# Altium PCB PCB1.PcbDoc
Units mm, origin at the board's own origin, x right, y up, seen from the top; angles counter-clockwise.
Board outline 40.13 x 45.13 mm, 2 copper layers (Top Layer, Bottom Layer); 36 components, 28 nets, 121 pads, 9 vias.
Unrouted connection lines stored in the file: 1.
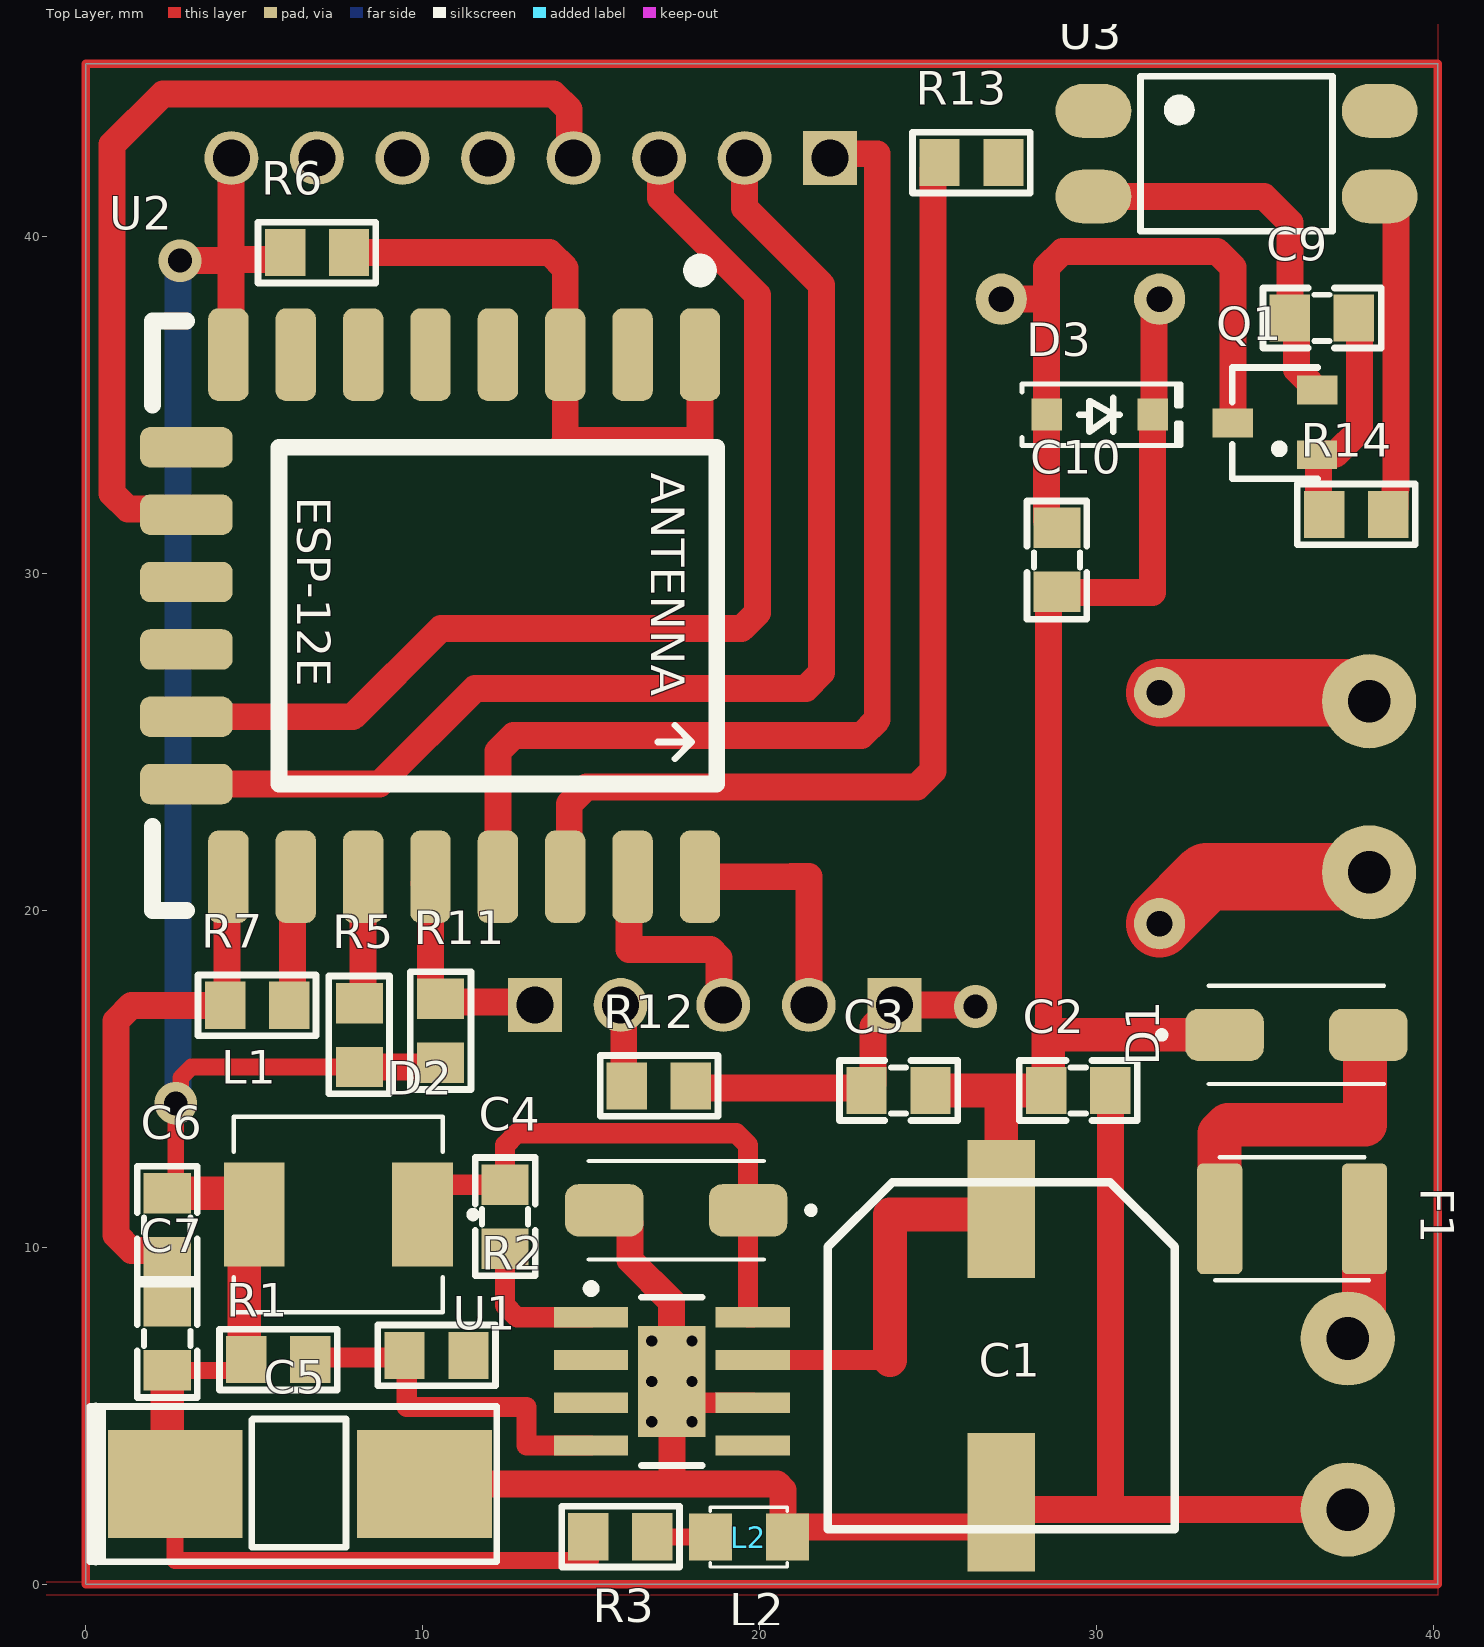
[diagram p0: Top Layer view]
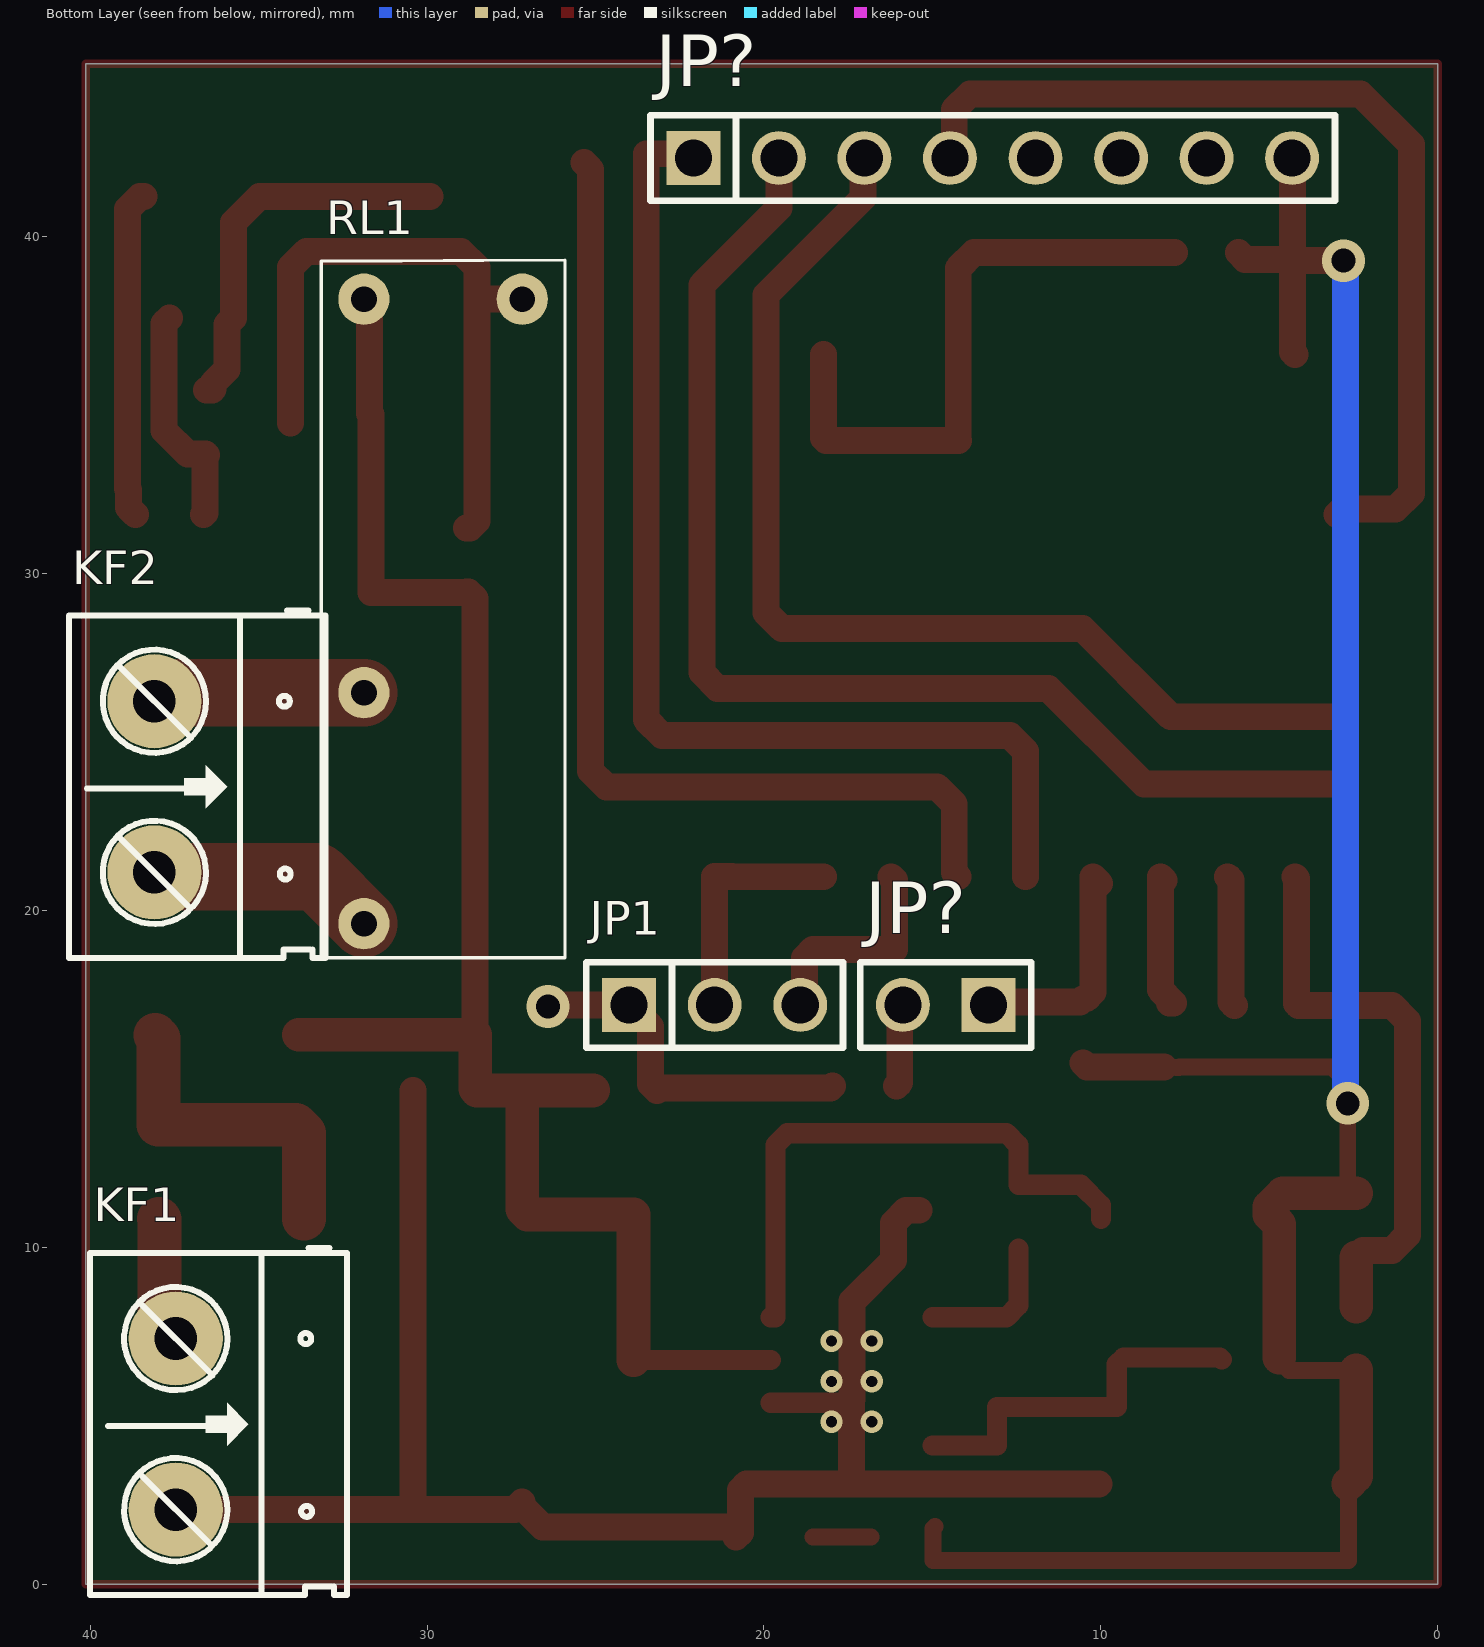
[diagram p1: Bottom Layer view, seen from below]
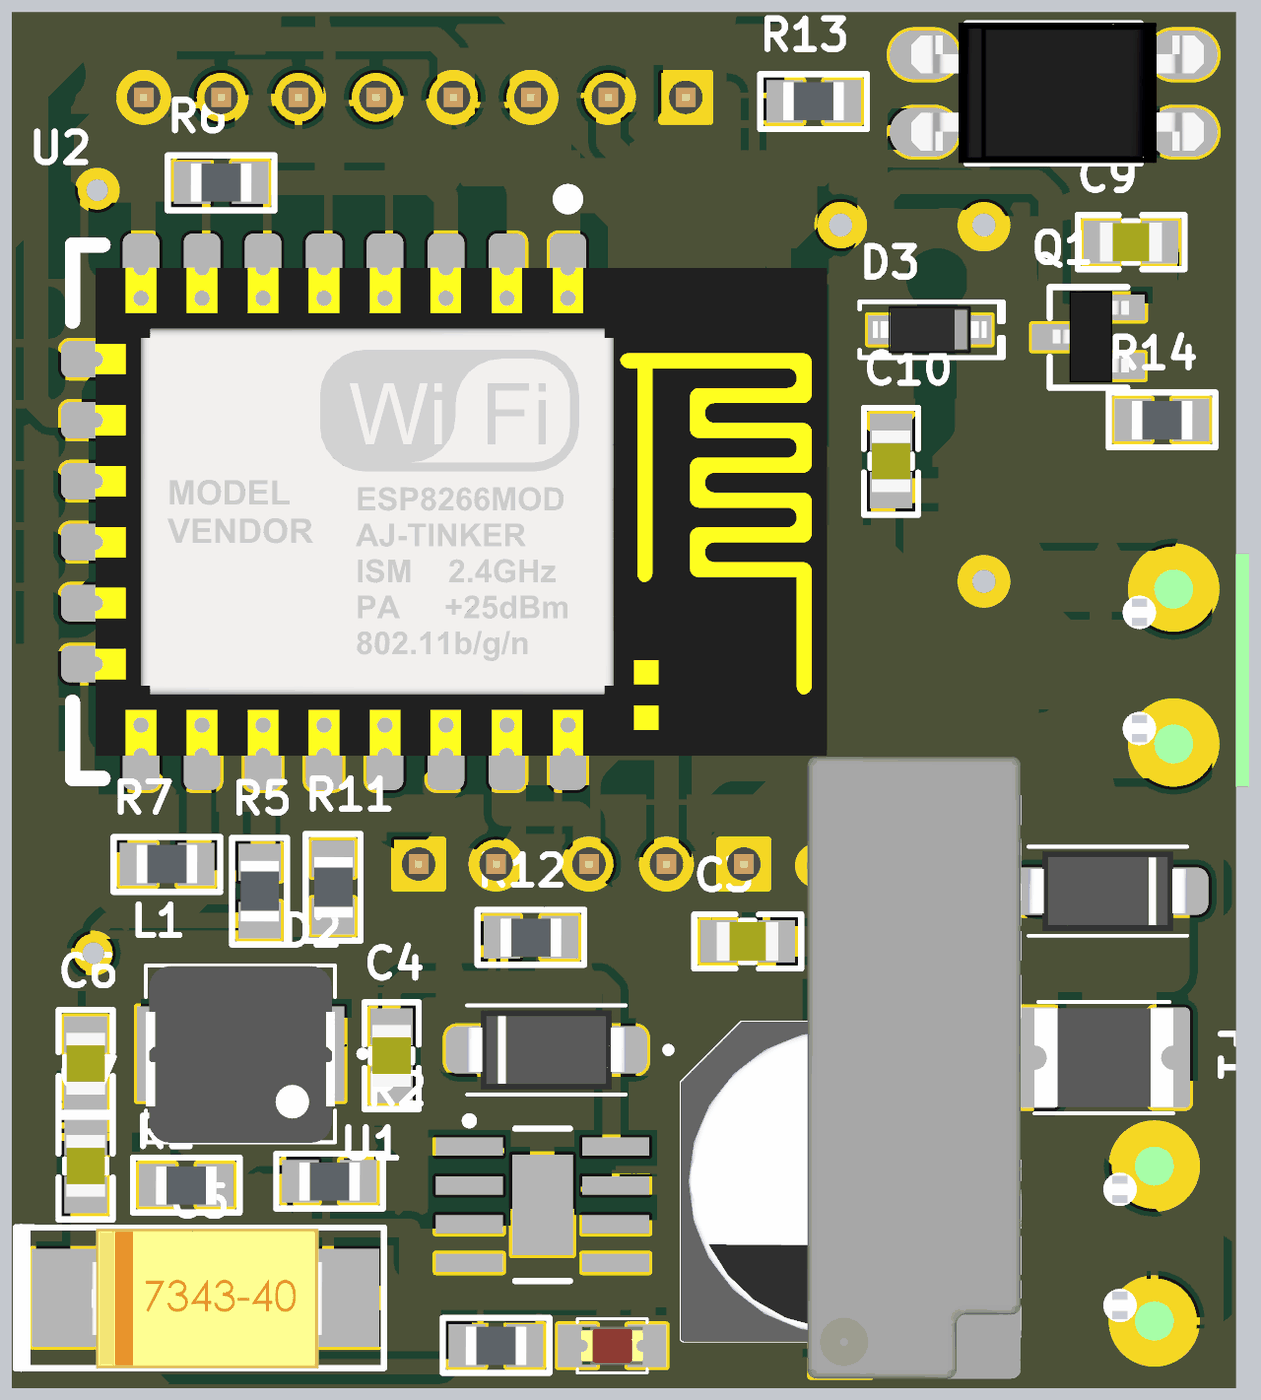
[diagram p2: 3D render of the assembled board from above, using the file's embedded part models]
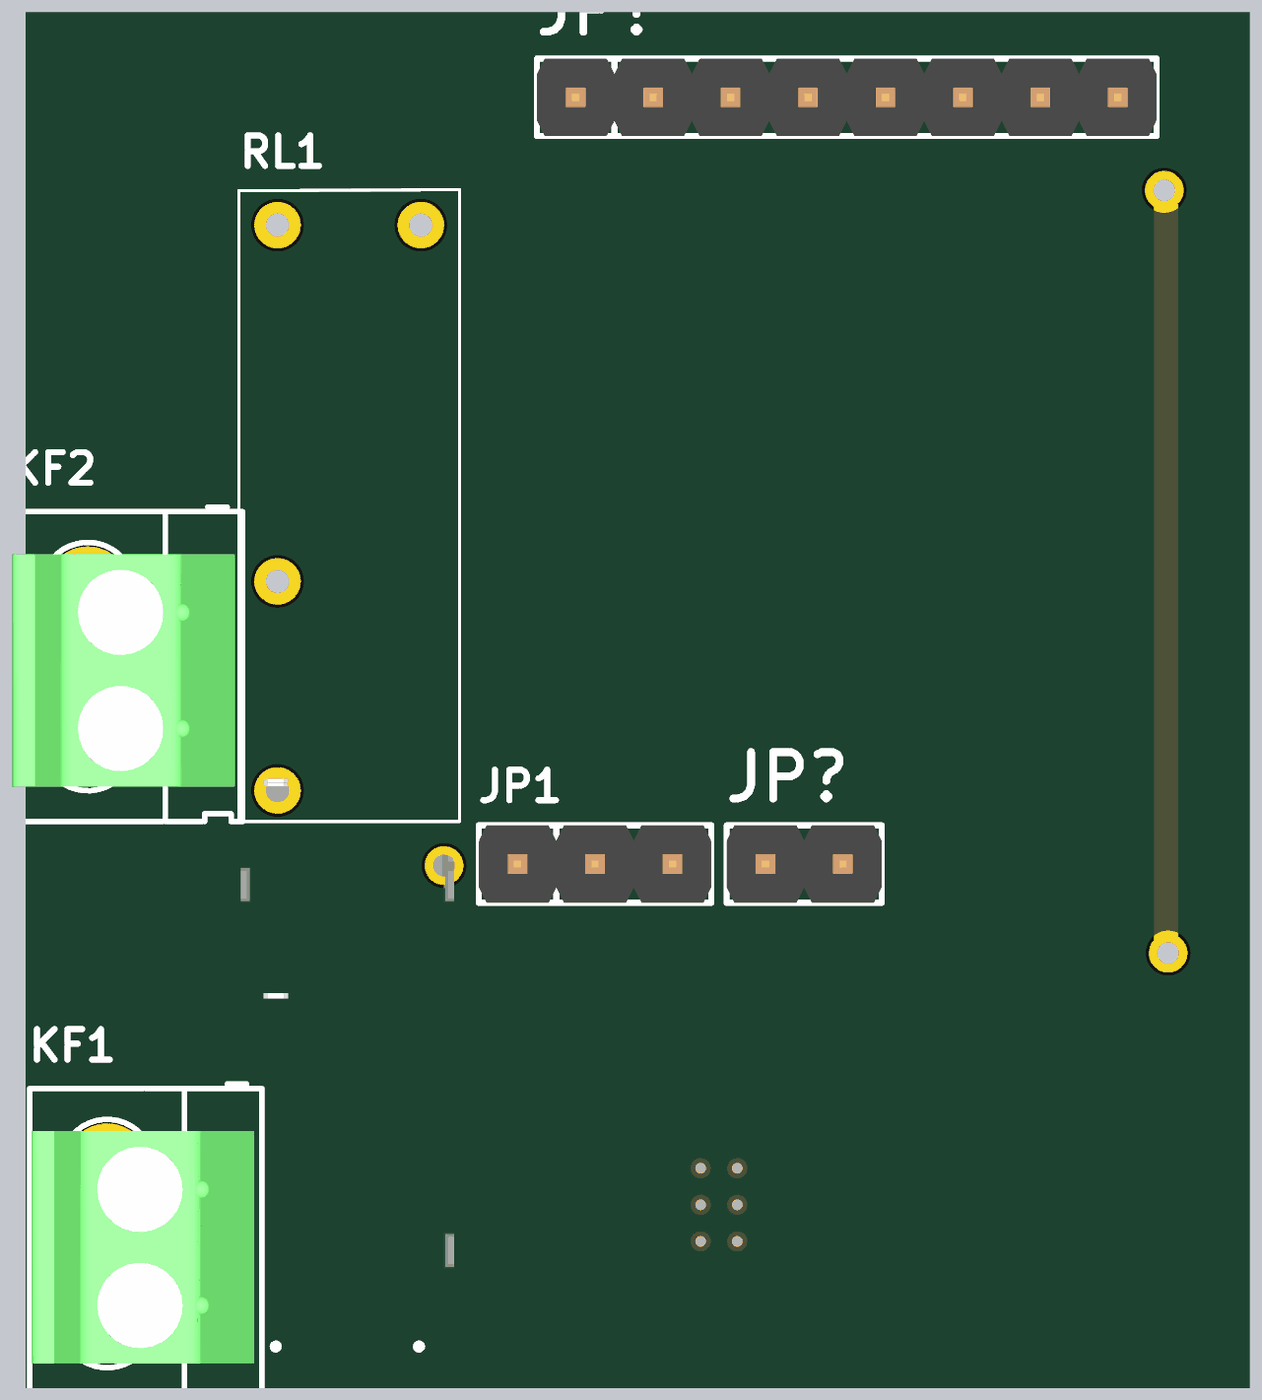
[diagram p3: 3D render of the assembled board from below, using the file's embedded part models]

## Layer stack, top to bottom
Top Solder: solder mask 0.0102, Solder Resist, Dk 3.5
Top Layer: signal copper 0.0356
Dielectric 1: dielectric 0.32, FR-4, Dk 4.8
Bottom Layer: signal copper 0.0356
Bottom Solder: solder mask 0.0102, Solder Resist, Dk 3.5

## Board outline
0,0 0,45.135 40.132,45.135 40.132,0

## Design rules (kind name [scope] priority, off if disabled: settings)
Clearance [All] p1: gap=0.254 ignorepadtopadclearanceinfootprint=FALSE except(0: Arc-Hole Track-Hole SMDPad-Hole THPad-Hole Via-Hole Fill-Hole Poly-Hole Region-Hole Text-Hole)
PolygonConnect [All] p1: connectstyle=Relief reliefconductorwidth=0.254 reliefentries=4 polygonreliefangle="90 Angle" airgapwidth=0.254
RoutingVias [All] p1: holewidth=0.711 width=1.27 viastyle="Through Hole" minholewidth=0.711 minwidth=1.27 maxholewidth=0.711 maxwidth=1.27
SolderMaskExpansion [All] p1: expansion=0.102 istentingtop=FALSE
Width [All] p1: maxlimit=2.5 minlimit=0.254 preferedwidth=0.8 minimp=50.000000 maximp=50.000000 favimp=50.000000
30 further rules are at their usual default settings.

## Classes and differential pairs
component class Sheet1: C1 C2 C3 C4 C5 C6 C7 C9 C10 D1 D2 D3 F1 JP1 JP? KF1 KF2 L1 L2 Q1 R1 R2 R3 R5 R6 R7 R11 R12 R13 R14 RL1 U1 U2 U3

## Components (designator, comment, footprint, x,y, rotation, side; value= is the part's Value field where it differs from the comment)
C1 "1000uF" "tu nhom 10 (G)" 27.178,6.781 r270 top
C2 "2.2nF" "tu 0805" 29.464,14.655 r0 top
C3 "2.2nF" "tu 0805" 24.13,14.655 r180 top
C4 "0.01uF" "tu 0805" 12.449,10.91 r270 top
C5 "470uF" "tu tantalum smd7343" 6.35,2.971 r0 top
C6 "10nF" "tu 0805" 2.416,10.656 r270 top
C7 "100nF" "tu 0805" 2.413,7.289 r90 top
C9 "10nF" "tu 0805" 36.703,37.592 r180 top
C10 "10nF" "tu 0805" 28.829,30.403 r90 top
D1 "B340A-13" B340A 35.941,16.306 r0 top
D2 "B340A-13" B340A 17.526,11.099 r180 top
D3 "S4" "DIODE SOD-123" 30.099,34.721 r0 top
F1 "2A 24V" "Cau chi tu phuc hoi 2A 24V SMD1812" 35.814,10.845 r180 top
JP1 "JP 1x3 2.54" "JP 1x3 DT" 24.003,17.195 r180 bottom
JP? "JP 1x2 2.54" "JP 1x2 DT" 13.335,17.195 r0 bottom
JP? "JP 1x8 2.54" "JP 1x8 DT" 22.098,42.341 r180 bottom
KF1 "CON 2 KF301" "Con 2 KF301 5.08" 37.465,7.289 r270 bottom
KF2 "CON 2 KF301" "Con 2 KF301 5.08" 38.1,26.212 r270 bottom
L1 "15uH" "CUON CAM SMD 0530" 7.493,10.972 r180 top
L2 "LED 0805" LED-0805-Red 18.542,1.397 r0 top
Q1 "BC817" SOT-23 35.306,34.467 r90 top value=C9014
R1 "10k" "RES 0805" 5.715,6.654 r180 top
R2 "5.9k" "RES 0805" 10.414,6.781 r180 top
R3 "1k" "RES 0805" 15.875,1.397 r180 top
R5 "10k" "RES 0805" 8.128,16.306 r270 top
R6 "10k" "RES 0805" 6.858,39.547 r0 top
R7 "10K" "RES 0805" 5.08,17.195 r0 top
R11 "10k" "RES 0805" 10.541,16.433 r270 top
R12 "470" "RES 0805" 17.018,14.782 r180 top
R13 "470" "RES 0805" 26.289,42.214 r0 top
R14 "1k" "RES 0805" 37.719,31.75 r180 top
RL1 "RelayHF46" "Relay 4 chan HF46F" 31.877,38.15 r90 bottom
U1 "tps5430-DIS" SOIC127P600X170_HS-8N 17.399,6.019 r0 top (schematic designator u1)
U2 "ESP-12E" ESP-12E 14.732,28.752 r270 top
U3 "OPTO PC817 SMD" SOP4 34.163,42.468 r0 top value=PC817
? "mfrc522" MFRC522 67.229,58.023 r270 top

## Footprints (in the part's own frame and the unit in brackets; to place one, negate y for a bottom-side part, rotate by r counter-clockwise, add the part's x,y. Pads: shape width x height; smd on the part's side, far side on the other; paste and mask are expansions set on the pad)
B340A [mm]
  rrect50% 2.33x1.55 smd: A(2.135,0) C(-2.135,0)
  silkscreen extent -4.1,-1.46 2.6,1.46, body extent -2.6,-1.3 2.6,1.3, height 2.4
"Cau chi tu phuc hoi 2A 24V SMD1812" [mm]
  rrect25% 1.34x3.29 smd: 1(-2.15,0) 2(2.15,0)
  silkscreen extent -2.28,-1.82 2.28,1.82, body extent -2.27,-1.62 2.27,1.62, height 1.25
"Con 2 KF301 5.08" [mil]
  round 110 hole 50: 1(0,0) 2(200,0)
  silkscreen extent -106,-100 300,200, body extent -45,-97 255,190, height 335
"CUON CAM SMD 0530" [mm] "CUON CAM SMD 0530"
  rect 1.8x3.1 smd: 1(-2.5,0) 2(2.5,0)
  silkscreen extent -4.1,-2.9 3.1,2.9, body extent -3.1,-2.88 3.1,2.92, height 3
"DIODE SOD-123" [mm] "SOD-123"
  rect 0.9x0.95 smd: 1(-1.575,0) 2(1.575,0)
  silkscreen extent -2.3,-0.92 2.41,0.92, body extent -1.86,-0.78 1.86,0.77, height 1.35
ESP-12E [mm]
  rrect50% 2.75x1.2 smd: 1(-7.75,3.5) 2(-7.75,1.5) 3(-7.75,-0.5) 4(-7.75,-2.5) 5(-7.75,-4.5) 6(-7.75,-6.5) 7(-7.75,-8.5) 8(-7.75,-10.5) 15(7.75,-10.5) 16(7.75,-8.5) 17(7.75,-6.5) 18(7.75,-4.5) 19(7.75,-2.5) 20(7.75,-0.5) 21(7.75,1.5) 22(7.75,3.5)
  rrect50% 1.2x2.75 smd: 9(-5,-11.75) 10(-3,-11.75) 11(-1,-11.75) 12(1,-11.75) 13(3,-11.75) 14(5,-11.75)
  silkscreen extent -10.5,-12.75 8.75,4, body extent -8.01,-12.01 8.01,12, height 2.66
"JP 1x2 DT" [mm] "2 pins, 1 row, straight, gold plating"
  rect 1.6x1.6 hole 1.1: 1(0,0)
  round 1.6 hole 1.1: 2(2.54,0)
  silkscreen extent -1.27,-1.27 3.81,1.27, body extent -1.27,-1.27 3.81,1.27, height 8.54
"JP 1x3 DT" [mm]
  rect 1.6x1.6 hole 1.1: 1(0,0)
  round 1.6 hole 1.1: 2(2.54,0) 3(5.08,0)
  silkscreen extent -1.27,-1.27 6.35,1.27, body extent -1.27,-1.27 6.35,1.27, height 8.54
"JP 1x8 DT" [mm] "8 pins, 1 row, straight, gold plating"
  rect 1.6x1.6 hole 1.1: 1(0,0)
  round 1.6 hole 1.1: 2(2.54,0) 3(5.08,0) 4(7.62,0) 5(10.16,0) 6(12.7,0) 7(15.24,0) 8(17.78,0)
  silkscreen extent -1.27,-1.27 19.05,1.27, body extent -1.27,-1.27 19.05,1.27, height 8.54
LED-0805-Red [mil]
  rect 50x55 smd: 1(0,0) 2(90,0)
  silkscreen extent 0,-35 90,35, body extent 5,-25 85,25, height 43
MFRC522 [mm]
  round 5.5 hole 3.5: 1(14.8,17) 1(14.8,-17) 1(51.8,-12.6) 1(51.8,12.4)
  rect 1.524x1.524 hole 0.762: 3(1.8,8.8)
  round 1.524 hole 0.762: 4(1.8,6.4) 5(1.8,4) 6(1.8,1.4) 7(1.8,-1.2) 8(1.8,-3.6) 9(1.8,-6) 10(1.8,-8.6)
  silkscreen extent 0,-20.13 60,19.69, body extent 0.4,-19.7 59.9,19.3, height 5
"Relay 4 chan HF46F" [mil]
  round 60 hole 30: 1(0,0) 2(0,-185.04) 3(-460,0) 4(-730,0)
  silkscreen extent -770,-235 46,50, body extent -763,-228 40,48, height 154
"RES 0805" [mm]
  rect 1.2x1.4 smd: 1(-0.946,-0.01) 2(0.954,-0.01)
  silkscreen extent -1.75,-0.91 1.75,0.89, body extent -1,-0.62 1,0.63, height 0.5
SOIC127P600X170_HS-8N [mm] "SOIC, 8-Leads, Body 5.0x4.0mm (max), Pitch 1.27mm, IPC Medium Density"
  rect 2.2x0.6 smd: 1(-2.4,1.905) 2(-2.4,0.635) 3(-2.4,-0.635) 4(-2.4,-1.905) 5(2.4,-1.905) 6(2.4,-0.635) 7(2.4,0.635) 8(2.4,1.905)
  rect 2x3.3 smd: 9(0,0)
  silkscreen extent -2.52,-2.5 0.9,2.88, body extent -2,-2.5 2,2.5, height 1.7
SOP4 [mm]
  oval 2.25x1.6 smd: 1(-4.25,1.27) 2(-4.25,-1.27) 3(4.25,-1.27) 4(4.25,1.27)
  silkscreen extent -2.85,-2.3 2.85,2.3, body extent -4.67,-2.29 4.93,2.31, height 3.6
SOT-23 [mm] "SOT 23 _ 1-3-2"
  rect 0.85x1.2 smd: 1(-0.94,-1.245) 2(0.985,-1.25) 3(0.005,1.25)
  silkscreen extent -1.65,-1.27 1.65,1.27, body extent -1.47,-1.33 1.53,1.17, height 1.06
"tu 0805" [mm] "Compoment SMD 80x50mil"
  rect 1.2x1.4 smd: 1(-0.946,-0.003) 2(0.954,-0.003)
  silkscreen extent -1.75,-0.89 1.75,0.89, body extent -1.01,-0.64 1.01,0.63, height 0.61
"tu nhom 10 (G)" [mm]
  rect 4.1x2 smd: 1(-4.35,0) 2(4.35,0)
  silkscreen extent -5.15,-5.15 5.15,5.15, body extent -5.9,-5.25 5.9,5.25, height 10.5
"tu tantalum smd7343" [mm]
  rect 4x3.2 smd: 1(-3.7,0) 2(3.7,0)
  silkscreen extent -6.23,-2.31 5.85,2.31, body extent -3.75,-2.33 3.85,2.27, height 3.99

## Part data
C1: library part "Tu Nhom 1000uF 16V", "Dán", Chung_Loai=Dán, Don_Vi=Con, Ma_Hang=MH004419, So_Chan=2, Ten_Linh_Kien="Tụ Nhôm 1000uF 16V 10x10MM"
C2 C3 C6 C7 C9 C10: library part "Tu 0805 22nF 50V 20%", "Dán", Chung_Loai=Dán, Don_Vi=Con, Ma_Hang=MH007857, So_Chan=2, Ten_Linh_Kien="Tụ 0805 22nF 50V 20%"
C4: library part "Tu 0805 15pF 50V 10%", "Dán", Chung_Loai=Dán, Don_Vi=Con, Ma_Hang=MH004556, So_Chan=2, Ten_Linh_Kien="Tụ 0805 15P 10% 50V"
C5: library part "Tu tantalum 470uF 10V SMD7343", "Dán", Chung_Loai=Dán, Don_Vi=Con, Ma_Hang=MH001956, So_Chan=2, Ten_Linh_Kien="Tụ tantalum 477A-470uF 10V SMD7343"
D1 D2: "Diode Schottky 40 V 3A Surface Mount SMA", Package="DO-214 Diodes Inc.", Availability="In Stock", Check_prices=https://www.snapeda.com/parts/B340A-13/Diodes+Inc./view-part/?ref=eda, MF="Diodes Inc.", MP=B340A-13, Price=None, Purchase-URL=https://pricing.snapeda.com/search/part/B340A-13/?ref=eda, SnapEDA_Link=https://www.snapeda.com/parts/B340A-13/Diodes+Inc./view-part/?ref=snap
D3: library part "Diode S4", "Dán", Chung_Loai=Dán, Don_Vi=Con, Ma_Hang=MH005519, Ten_Linh_Kien="Diode S4 SOD123 ( 1N5819 SOD123)"
F1: library part "Cau chi tu phuc hoi 2A 24V SMD1812", "2A 24V SMD1812", Ma_Hang=MH010033, Ten="Cầu Chì Tự Phục Hồi 2A 24V SMD1812"
JP1: library part "JP 1x3 2.54 Duc Thang", "Cắm", Chung_Loai=Cắm, Don_Vi=Con, Ma_Hang=MH000903, Ten_Linh_Kien="Jump Đơn Đực 2.54MM 1x40P Thẳng 11MM"
JP?: library part "JP 1x2 2.54 Duc Thang", "Cắm", Chung_Loai=Cắm, Don_Vi=Con, Ma_Hang=MH000903, Ten_Linh_Kien="Jump Đơn Đực 2.54MM 1x40P Thẳng 11MM"
JP?: library part "JP 1x8 2.54 Duc Thang", "Cắm", Chung_Loai=Cắm, Don_Vi=Con, Ma_Hang=MH000903, Ten_Linh_Kien="Jump Đơn Đực 2.54MM 1x40P Thẳng 11MM"
KF1 KF2: "Cắm", Chung_Loai=Cắm, Don_Vi=Con, Ma_Hang=MH000987, Ten_Linh_Kien="CON 2 KF301-2P 5.08MM Xanh Dương"
L1: library part "Cuon Cam SMD 0530", "SMD 0530", Package=None, Availability=Unavailable, MP=FDV0530-H-1R5M=P3, Price=None
L2: library part "LED 0805 Do", "Dán", Chung_Loai=Dán, Don_Vi=Con, Ma_Hang=MH000897, Ten_Linh_Kien="LED 0805 Màu Đỏ (Red)"
Q1: library part "Trans BC817", "SOT-23 - C8658"
R1 R5 R6 R11: library part "RES 0805", "RES SMD 0805", Manufacturer="Vishay Dale", Manufacturer Part Number=CRCW040210K0FKED, Operating Temperature="-55°C ~ 155°C", Package / Case="0402 (1005 Metric)", Power (Watts)="0.063W, 1/16W", Supplier Part Number 1=541-10.0KLCT-ND, Temperature Coefficient=±100ppm/°C, Tolerance=±1%, Category=Resistors, ComponentLink1Description=http://www.vishay.com/docs/20035/dcrcwe3.pdf, ComponentLink1URL=http://www.vishay.com/docs/20035/dcrcwe3.pdf, Composition="Thick Film", Features="Automotive AEC-Q200", Height="0.016\" (0.40mm)", Number of Terminations=2, Packaging="Cut Tape (CT)", Pricing 1="10=0.083, 50=0.0444, 200=0.0255, 1000=0.0174 (USD)", Resistance (Ohms)=10k, RoHS="RoHS Compliant", Size / Dimension="0.039\" L x 0.020\" W (1.00mm x 0.50mm)", Stock 1=2392462, Supplier 1=Digi-Key, Supplier Device Package="0402 (1005 Metric)"
R2 R3 R7 R12 R13 R14: library part "RES 0805", "RES SMD 0805", Manufacturer="Vishay Dale", Manufacturer Part Number=CRCW040210K0FKED, Operating Temperature="-55°C ~ 155°C", Package / Case="0402 (1005 Metric)", Power (Watts)="0.063W, 1/16W", Resistance (Ohms)=10k, Supplier Part Number 1=541-10.0KLCT-ND, Temperature Coefficient=±100ppm/°C, Tolerance=±1%, Category=Resistors, ComponentLink1Description=http://www.vishay.com/docs/20035/dcrcwe3.pdf, ComponentLink1URL=http://www.vishay.com/docs/20035/dcrcwe3.pdf, Composition="Thick Film", Features="Automotive AEC-Q200", Height="0.016\" (0.40mm)", Number of Terminations=2, Packaging="Cut Tape (CT)", Pricing 1="10=0.083, 50=0.0444, 200=0.0255, 1000=0.0174 (USD)", RoHS="RoHS Compliant", Size / Dimension="0.039\" L x 0.020\" W (1.00mm x 0.50mm)", Stock 1=2392462, Supplier 1=Digi-Key, Supplier Device Package="0402 (1005 Metric)"
RL1: library part "Relay 4 chan HF46F", "Relay 4 chan HF46F", Ma_Hang=MH003879, Ten="Relay 5V5A HF46F-G 5-HS1"
U2: "ESP8266 ESP-12E Module (ESP8266, Castellated Holes)", Manufacturer=AI-THINKER, Manufacturer Part Number=ESP-12E
U3: "Single Opto"

## Via types
v1: diameter 0.66, hole 0.33, Top Layer to Bottom Layer, tented top, 6 vias
v2: diameter 1.27, hole 0.711, Top Layer to Bottom Layer, 3 vias

## Nets (pads, with @x,y where several pads share a name; then routed paths per layer and width w, separated by ;. In a path a pad name is that pad's centre, name@x,y a point inside that pad or via, vN(x,y) a via of type N, cw(c..) or ccw(c..) an arc to the next point about the centre after c; other vN are vias at no path point)
+3.3V: C5.1 C6.1 C7.1 JP?.8 L1.2 R1.2 R3.2 R5.2 R6.1 R11.2 U2.8 | length 74.2
  Top Layer w0.5: C6.1 2.667,11.856 v2(2.667,14.274) 2.814,14.421 2.814,15.032 3.134,15.352 7.668,15.352 7.678,15.342 R5.2@7.747,15.342 ; C7.1 4.411,6.343 4.699,6.632 R1.2@4.699,6.726 ; C5.1 2.65,0.702 14.986,0.702 14.986,1.646 R3.2@14.921,1.711
  Top Layer w0.8: v2(2.794,39.293) 4.271,39.293 4.31,39.332 ; U2.8 4.31,36.58 4.31,39.332 ; JP?.8 4.31,42.333 4.31,39.332 ; R6.1 5.912,39.532 5.712,39.332 4.31,39.332 ; R5.2 10.404,15.352 R11.2
  Top Layer w1: C6.1 4.593,11.602 4.993,11.202 L1.2 4.699,10.678 R1.2@4.699,6.726 ; C7.1 2.416,3.205 C5.1
  Bottom Layer w0.8: v2(2.667,14.274) 2.73,14.337 2.73,39.229 v2(2.794,39.293)
+12V: C1.1 C2.1 C3.1 C10.1 D1.C D3.2 RL1.1 U1.7 | length 50.5
  Top Layer w0.6: U1.7 23.876,6.654
  Top Layer w0.8: 28.575,16.306 28.575,29.257 28.775,29.457 C10.1 28.852,29.438 31.674,29.438 D3.2 31.712,34.759 31.712,38.112 RL1.1@31.75,38.15
  Top Layer w1: 23.876,6.654 23.876,10.972 27.019,10.972 C1.1 27.178,14.655 ; C3.1 25.079,14.655 27.178,14.655 ; D1.C 28.575,16.306 28.575,14.708 C2.1 28.515,14.655 27.178,14.655
FLASH: JP?.1@13.335,17.195 R11.1 U2.18 | length 7
  Top Layer w0.8: U2.18@10.033,20.803 U2.18 10.232,17.579 10.432,17.379 R11.1 10.623,17.287 13.243,17.287 JP?.1@13.335,17.195
GND: C1.2 C2.2 C3.2 C5.2 C6.2 C7.2 C9.2 D2.A JP1.1 JP?.6 KF1.2 L2.2 Q1.2 R2.1 R7.1 R12.1 U1.6 U1.9 U2.15 U3.2 | length 92.4
  Top Layer w0.6: U1.9@17.476,5.384 U1.6
  Top Layer w0.8: C6.2 2.213,9.902 1.358,9.902 0.889,10.371 0.889,16.716 1.358,17.185 R7.1 4.183,17.234 4.183,20.953 U2.15 ; C5.2 17.399,2.971 ; D2.A 15.781,11.099 16.156,10.724 16.156,9.625 17.381,8.4 17.381,5.479 U1.9@17.476,5.384 ; U1.9@17.399,5.461 17.399,2.971 ; R12.1 18.03,14.725 23.109,14.725 C3.2 23.368,14.851 23.368,16.56 JP1.1 26.366,17.195 v2(26.416,17.145) ; L2.2 20.701,1.524 20.701,2.794 20.524,2.971 17.399,2.971 ; L2.2@20.828,1.701 26.578,1.701 27.178,2.301 C1.2 27.4,2.209 30.353,2.209 ; U3.2 34.976,41.198 35.749,40.425 C9.2 35.949,37.395 35.949,36.06 36.356,35.652 36.356,35.477 36.381,35.452 Q1.2 ; C2.2 30.418,2.274 30.353,2.209 ; KF1.2 30.353,2.209
  Top Layer w1: C6.2 2.415,9.7 2.415,9.271 C7.2 C7.2
  other v1: 16.799,4.819 17.999,4.819 16.799,6.019 17.999,6.019 16.799,7.219 17.999,7.219
MISO: JP?.4 U2.10 | length 28.7
  Top Layer w0.8: U2.10 2.818,31.916 1.25,31.916 0.781,32.385 0.781,42.741 2.286,44.246 13.882,44.246 14.351,43.777 14.351,42.468 JP?.4
MOSI: JP?.3 U2.13 | length 32.9
  Top Layer w0.8: U2.13 7.922,25.752 10.541,28.371 19.47,28.371 19.939,28.84 19.939,38.277 17.061,41.155 17.061,42.298 JP?.3
NetC4_1: C4.1 D2.C L1.1 U1.8 | length 17
  Top Layer w0.6: L1.1@9.993,10.845 9.993,11.256 10.593,11.856 C4.1 12.446,13.034 12.797,13.385 19.31,13.385 19.661,13.034 D2.C 19.661,7.924 U1.8
NetC4_2: C4.2 U1.1 | length 4.4
  Top Layer w0.6: C4.2 12.446,8.275 12.797,7.924 U1.1
NetC9_1: C9.1 Q1.1 R14.2 | length 6.8
  Top Layer w0.8: Q1.1 36.576,33.552 37.108,33.552 37.81,34.254 37.81,37.434 C9.1 ; Q1.1@36.569,33.527 36.594,33.502 36.594,31.803 R14.2@36.638,31.76
NetC10_2: C10.2 D3.1 Q1.3 RL1.2 | length 20
  Top Layer w0.8: RL1.2@27.05,38.15 28.448,38.15 28.524,38.074 ; C10.2 28.732,31.357 28.524,31.566 D3.1 28.524,38.15 28.524,39.097 28.993,39.566 33.587,39.566 34.056,39.097 Q1.3
NetD1_A: D1.A F1.2 | length 9.7
  Top Layer w1.3: F1.2 33.655,10.854 33.655,13.385 33.909,13.639 37.973,13.639 37.973,16.203 D1.A
NetF1_1: F1.1 KF1.1 | length 3.8
  Top Layer w1.3: KF1.1 37.465,7.693 37.944,8.172 37.944,10.825 F1.1
NetJP?_2: JP?.2@15.875,17.195 R12.2 | length 2.5
  Top Layer w0.8: JP?.2@15.875,17.195 15.969,17.101 15.969,14.886 R12.2
NetKF2_1: KF2.1 RL1.3 | length 6.3
  Top Layer w0.8: KF2.1@37.846,26.466 KF2.1
  Top Layer w2: RL1.3 KF2.1@37.846,26.466
NetKF2_2: KF2.2 RL1.4 | length 6.9
  Top Layer w0.8: KF2.2@37.973,21.005 KF2.2
  Top Layer w2: RL1.4 33.274,21.005 KF2.2@37.973,21.005
NetL2_1: L2.1 R3.1 | length 1.7
  Top Layer w0.5: R3.1 16.826,1.402 18.537,1.402 L2.1
NetR1_1: R1.1 R2.2 U1.4 | length 11.1
  Top Layer w0.6: R1.1@6.407,6.664 6.47,6.728 9.324,6.728 9.525,6.527 9.525,5.257 13.081,5.257 13.081,4.114 U1.4
NetR5_1: R5.1 U2.17 | length 4.2
  Top Layer w0.8: R5.1@7.837,17.252 8.232,17.647 U2.17 U2.17@8.128,20.898 ; R5.1@7.864,17.252 R5.1@7.964,17.252
NetR6_2: R6.2 U2.1 U2.3 | length 18.2
  Top Layer w0.8: R6.2 13.763,39.537 14.232,39.068 U2.3 14.232,33.967 14.224,33.959 18.161,33.959 18.232,34.03 U2.1
NetR7_2: R7.2 U2.16 | length 3.9
  Top Layer w0.8: R7.2 6.133,17.284 6.133,20.903 U2.16
NetR13_2: R13.2 U3.1
NetR14_1: R14.1 U3.3 | length 9.8
  Top Layer w0.8: U3.3 38.522,41.198 38.891,40.828 38.891,40.341 38.903,40.329 38.903,32.529 38.865,32.491 38.865,31.96 R14.1
RELAY: R13.1 U2.20 | length 31.6
  Top Layer w0.8: U2.20 14.351,21.121 14.351,23.164 14.859,23.672 24.677,23.672 25.146,24.141 25.146,42.007 R13.1
RST: JP?.7
RXD: JP1.3 U2.21 | length 6.4
  Top Layer w0.8: U2.21 16.129,20.899 16.129,18.846 18.542,18.846 18.796,18.592 18.796,17.322 JP1.3
SCL: JP?.2@19.558,42.341 U2.14 | length 36.5
  Top Layer w0.8: U2.14 8.716,23.752 11.557,26.593 21.375,26.593 21.844,27.062 21.844,38.577 19.558,40.863 JP?.2@19.558,42.341
SS: JP?.1@22.098,42.341 U2.19 | length 33.6
  Top Layer w0.8: U2.19 12.232,24.727 12.701,25.196 23.026,25.196 23.495,25.665 23.495,42.468 22.225,42.468 JP?.1@22.098,42.341
TXD: JP1.2 U2.22 | length 7
  Top Layer w0.8: U2.22 20.952,21.002 20.955,21.005 21.463,21.005 JP1.2
pads on no net: ?.1 ?.3 ?.4 ?.5 ?.6 ?.7 ?.8 ?.9 ?.10 JP?.5 U1.2 U1.3 U1.5 U2.2 U2.4 U2.5 U2.6 U2.7 U2.9 U2.11 U2.12 U3.4
copper on no net: | length 170.5
  Top Layer w0.254: 0,0 40.132,0 40.132,45.135 0,45.135 0,0

## Polygon pours and split planes (outlines as drawn)
GND on Top Layer "NONET_L01_P000" (solid, remove dead copper, shelved, pour order 0): 40.132,49.707 40.132,-0.331 -21.844,-0.331 -21.844,49.58 -21.971,49.707
GND on Top Layer "NONET_L01_P001" (solid, shelved, pour order 1): -6.731,48.691 -6.477,48.945 40.132,48.945 40.132,-0.077 40.005,0.05 -6.731,0.05
GND on Top Layer "t" (solid, remove dead copper, shelved, pour order 2): 0,45.135 40.132,45.135 40.132,0.05 40.068,-0.014 40.055,0 0,0 0,45.135

## Other copper
Top Layer:
  pour cut-out: 1.524,19.481 26.797,19.481 26.797,39.547 26.67,39.42 1.524,39.42

## Text inside footprints (layer, text, board x,y; h text height)
U2: Top Overlay "ANTENNA" at 16.782,33.002 h1 r270; Mechanical 13 "ANTENNA / KEEP-OUT" at 21.643,34.7 h1.5 r270
?: Mechanical 1 "MFRC522" at 70.375,52.169 h1.52 r180; Mechanical 1 "MFRC522" at 51.683,23.769 h1.52 r270